# Altium PCB ABC2.PcbDoc (part 2 of 2)
Units mil, origin at the board's own origin, x right, y up, seen from the top; angles counter-clockwise.
Board outline 3540 x 3620 mil, 2 copper layers (Top Layer, Bottom Layer); 54 components, 102 nets, 450 pads, 156 vias.
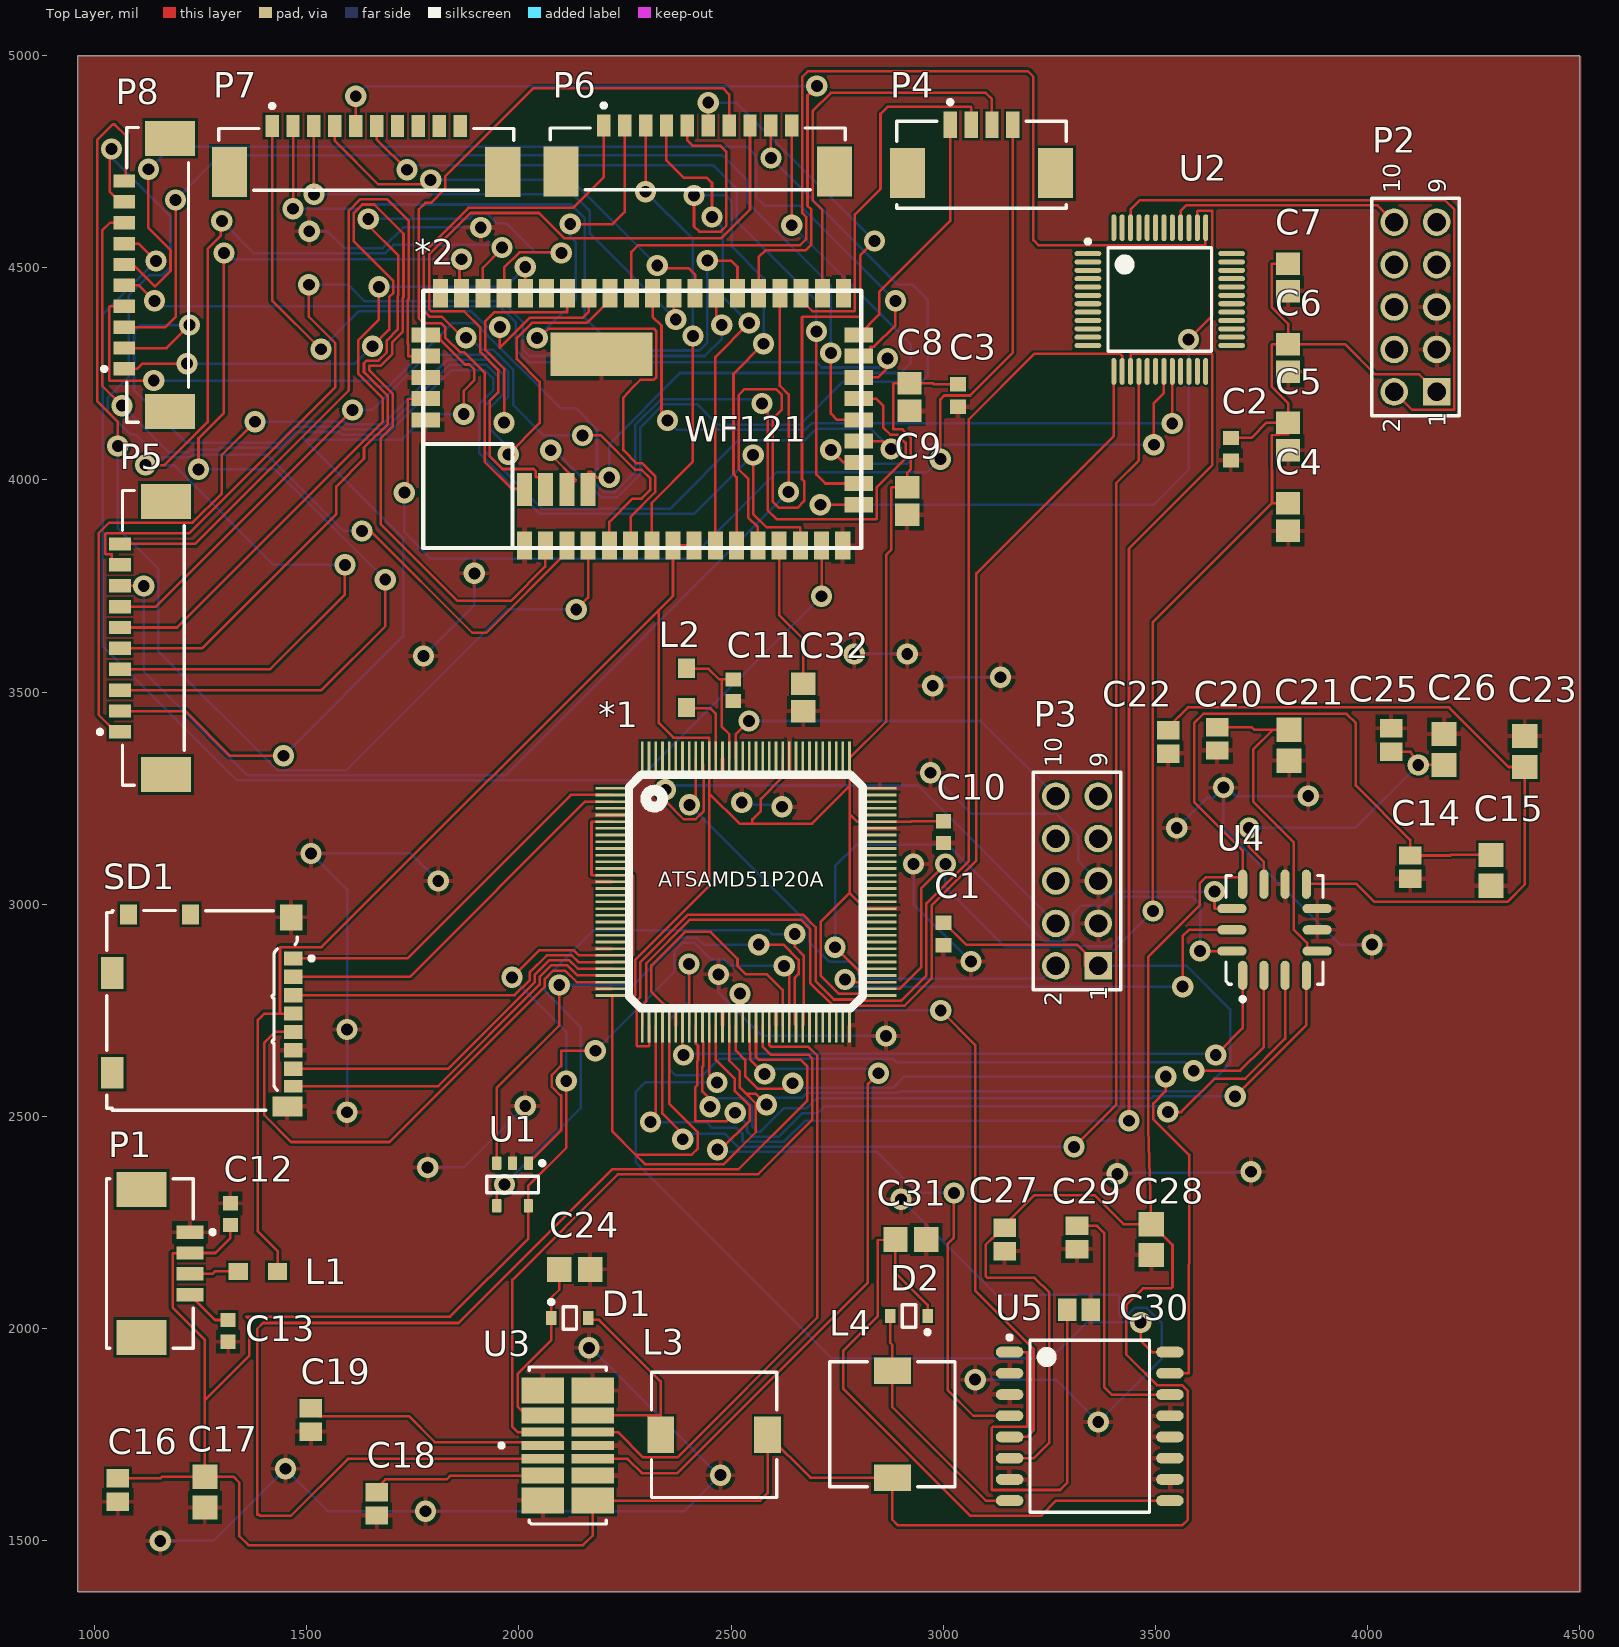
[diagram p0: Top Layer view]

## Via types
v1: diameter 50, hole 28, Top Layer to Bottom Layer, 156 vias

## Nets (pads, with @x,y where several pads share a name; then routed paths per layer and width w, separated by ;. In a path a pad name is that pad's centre, name@x,y a point inside that pad or via, vN(x,y) a via of type N, cw(c..) or ccw(c..) an arc to the next point about the centre after c; other vN are vias at no path point) (continued)
SWDIO21: (continued)
  Top Layer w6: U2.46 3441.1,4637.5 3462.39,4658.79 4182.71,4658.79 4204,4637.5 4204,4166 4203,4165 4104.89,4165 P2.2
SWDIO51: *1.120 P3.2 | length 1184.8
  Top Layer w6: v1(2402,3234.5) 2416.85,3249.35 *1.120
  Bottom Layer w6: v1(2402,3234.5) 2684,2952.5 2684,2911.92 2730.92,2865 2779.85,2865 2819.85,2825 3235,2825 P3.2
TEMPCLK: *1.57 U1.4 | length 1516.8
  Top Layer w6: U1.4 1947.6,2321.6 v1(1966,2340) ; v1(2650,2930) 2650,2900.05 2671,2879.05 2671,2716.59 *1.57
  Bottom Layer w6: v1(1966,2340) 2145.5,2519.5 2145.5,2711.42 2061,2795.92 2061,2824.08 2175.92,2939 2587.5,2939 2596.5,2930 v1(2650,2930)
TEMPCS: *1.55 U1.1 | length 1144.2
  Top Layer w6: U1.1 2099.4,2467.2 2099.4,2550 2097.42,2550 2077.5,2569.92 2077.5,2598.09 2097.42,2618 2099.4,2618 2099.4,2655 v1(2180,2655) ; v1(2625,2855) 2625,2845 2637.32,2832.68 *1.55
  Bottom Layer w6: v1(2180,2655) 2366,2841 2366,2889.08 2385.92,2909 2414.08,2909 2454.08,2869 2484.08,2869 2498.08,2855 v1(2625,2855)
TEMPMISO: *1.56 U1.3 | length 1271.8
  Top Layer w6: U1.3 1947.6,2567 2095,2714.4 v1(2095,2810) ; v1(2565,2905) 2623.08,2905 2659,2869.08 2659,2835.92 2650.29,2827.21 2650.29,2717.19 *1.56
  Bottom Layer w6: v1(2095,2810) 2269.95,2810 2380.95,2921 2419.05,2921 2435.05,2905 v1(2565,2905)
WFCLK: *2.19 U2.19 | length 1053.5
  Top Layer w6: v1(2735,4071) 2764.42,4041.58 *2.19 ; v1(3496,4083) 3496,4181.16 3519.84,4205 U2.19
  Bottom Layer w6: v1(2735,4071) 2768,4038 2914,4038 2959,4083 v1(3496,4083)
WFCS: *2.17 U2.38 | length 1701
  Top Layer w6: v1(2710.15,3941.58) *2.17 ; v1(3578,4331) 3634,4387 3634,4633.79 3633,4634.79 3600,4634.79 3598.58,4633.37 U2.38
  Bottom Layer w6: v1(2710.15,3941.58) 3496.08,3941.58 3578,4023.5 v1(3578,4331)
WFMISO: *2.36 U2.37 | length 2299.5
  Top Layer w6: *2.36 2265,4537.5 2280.5,4553 2662.5,4553 2677,4567.5 2677,4620 2668,4629 2668,4950 2681,4963 3199,4963 3212,4950 3212,4565 3224,4553 3617.27,4553 U2.37
WFMOSI: *2.35 U2.20 | length 1642
  Top Layer w6: *2.35 2315,4384.42 2336,4363.42 2336,4154 v1(2350,4140) ; v1(3539.53,4133.09) U2.20
  Bottom Layer w6: v1(2350,4140) 2372,4118 2673.91,4118 2689,4133.09 v1(3539.53,4133.09)
pads on no net: *1.1 *1.4 *1.7 *1.8 *1.9 *1.10 *1.11 *1.12 *1.13 *1.16 *1.17 *1.18 *1.19 *1.20 *1.21 *1.22 *1.23 *1.24 *1.58 *1.59 *1.60 *1.61 *1.62 *1.63 *1.69 *1.70 *1.71 *1.72 *1.73 *1.74 *1.75 *1.76 *1.77 *1.80 *1.81 *1.82 *1.83 *1.84 *1.85 *1.86 *1.87 *1.88 *1.89 *1.92 *1.93 *1.94 *1.95 *1.98 *1.99 *1.100 *1.101 *1.102 *1.103 *1.104 *1.105 *1.108 *1.109 *1.110 *1.111 *1.112 *1.113 *1.121 *1.122 *1.123 *1.124 *1.125 *1.126 *1.127 *1.128 *2.40 P1.MP1 P1.MP2 P2.6 P2.7 P2.8 P2.9 P3.6 P3.7 P3.8 P3.9 P4.MP1 P4.MP2 P5.MP1 P5.MP2 P6.MP1 P6.MP2 P7.MP1 P7.MP2 P8.MP1 P8.MP2 SD1.9 SD1.10 SD1.13 SD1.14 U2.1 U2.2 U2.3 U2.4 U2.5 U2.6 U2.7 U2.8 U2.9 U2.10 U2.11 U2.12 U2.17 U2.18 U2.21 U2.22 U2.23 U2.24 U2.25 U2.26 U2.27 U2.28 U2.29 U2.30 U2.31 U2.32 U2.33 U2.34 U2.35 U2.36 U2.39 U2.41 U2.42 U2.43 U2.44 U2.47 U2.48

## Polygon pours and split planes (outlines as drawn)
no net on Top Layer "Top Layer-No Net 2" (none, pour order 8): 1774.13,4081.3 1984.13,4081.3 1985.32,4080.12 1985.32,3840.51 1778.35,3840.51 1774.13,3836.3
GND on Top Layer "Ground Plane" (solid, remove dead copper, pour order 9): 962.71,4998.63 4502.71,4998.63 4502.71,1378.63 962.71,1378.63
no net on Bottom Layer "Bottom Layer-No Net" (none, pour order 10): 1770,4081.73 1990,4081.73 1990,3831.73 1985,3836.73 1775,3836.73

## Text inside footprints (layer, text, board x,y; h text height)
P2: Top Overlay "10" at 4077.01,4675.55 h40 r90; Top Overlay "9" at 4183.31,4675.55 h40 r90; Top Overlay "1" at 4183.31,4123.59 h40 r90; Top Overlay "2" at 4077.01,4111.78 h40 r90
P3: Top Overlay "10" at 3279.57,3323.11 h40 r90; Top Overlay "9" at 3385.87,3323.11 h40 r90; Top Overlay "1" at 3385.87,2771.14 h40 r90; Top Overlay "2" at 3279.57,2759.33 h40 r90